# Altium PCB BMS pcb layout 2.PcbDoc
Units mil, origin at the board's own origin, x right, y up, seen from the top; angles counter-clockwise.
Board outline 3940 x 3940 mil, 2 copper layers (Top Layer, Bottom Layer); 47 components, 36 nets, 164 pads, 30 vias.
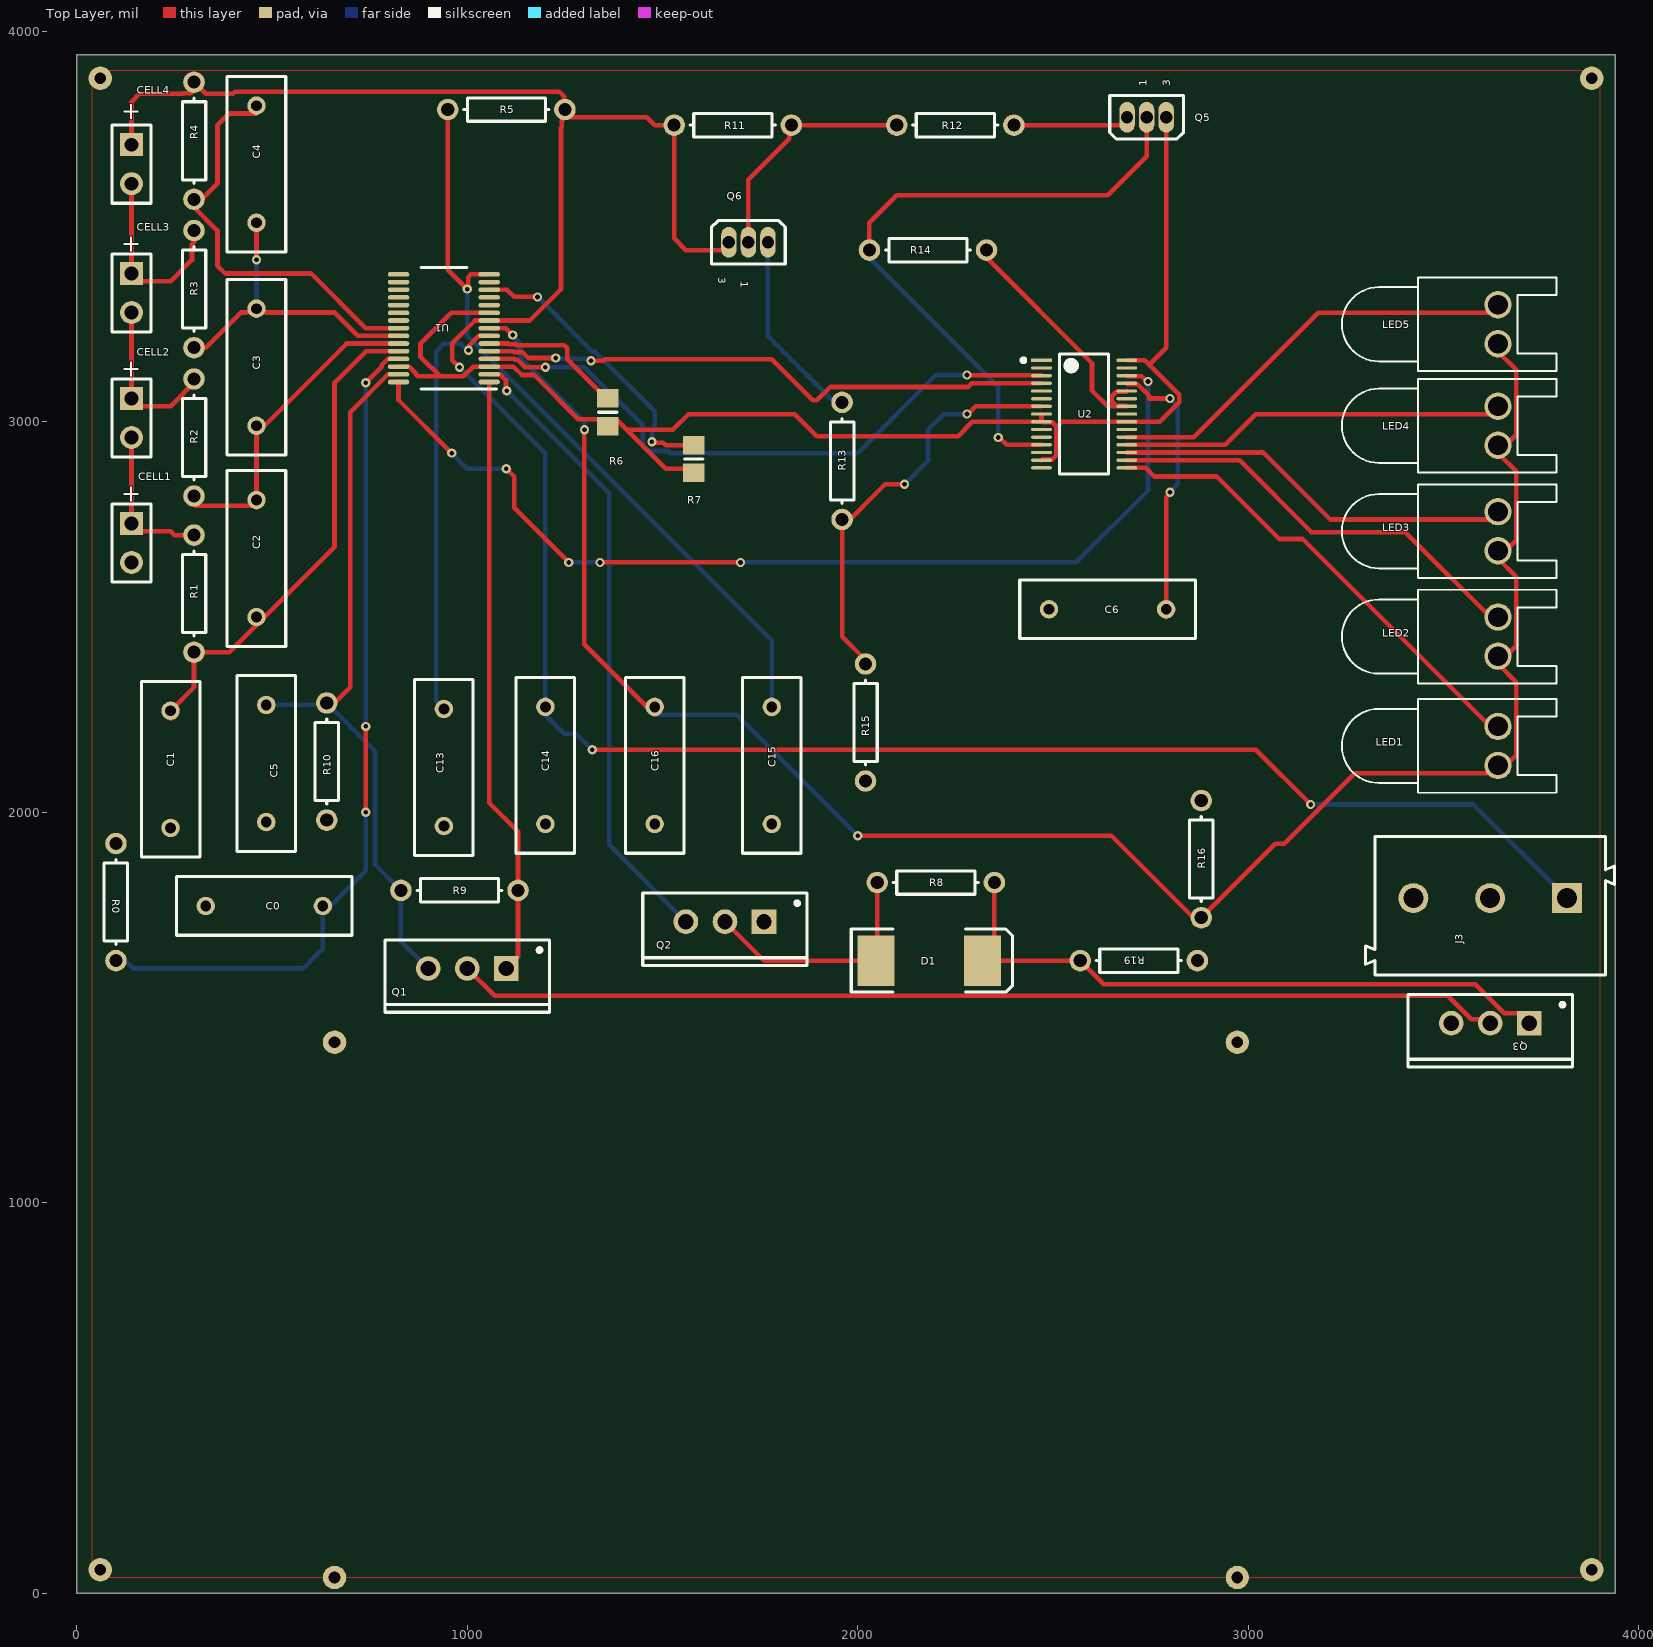
[diagram p0: Top Layer view]
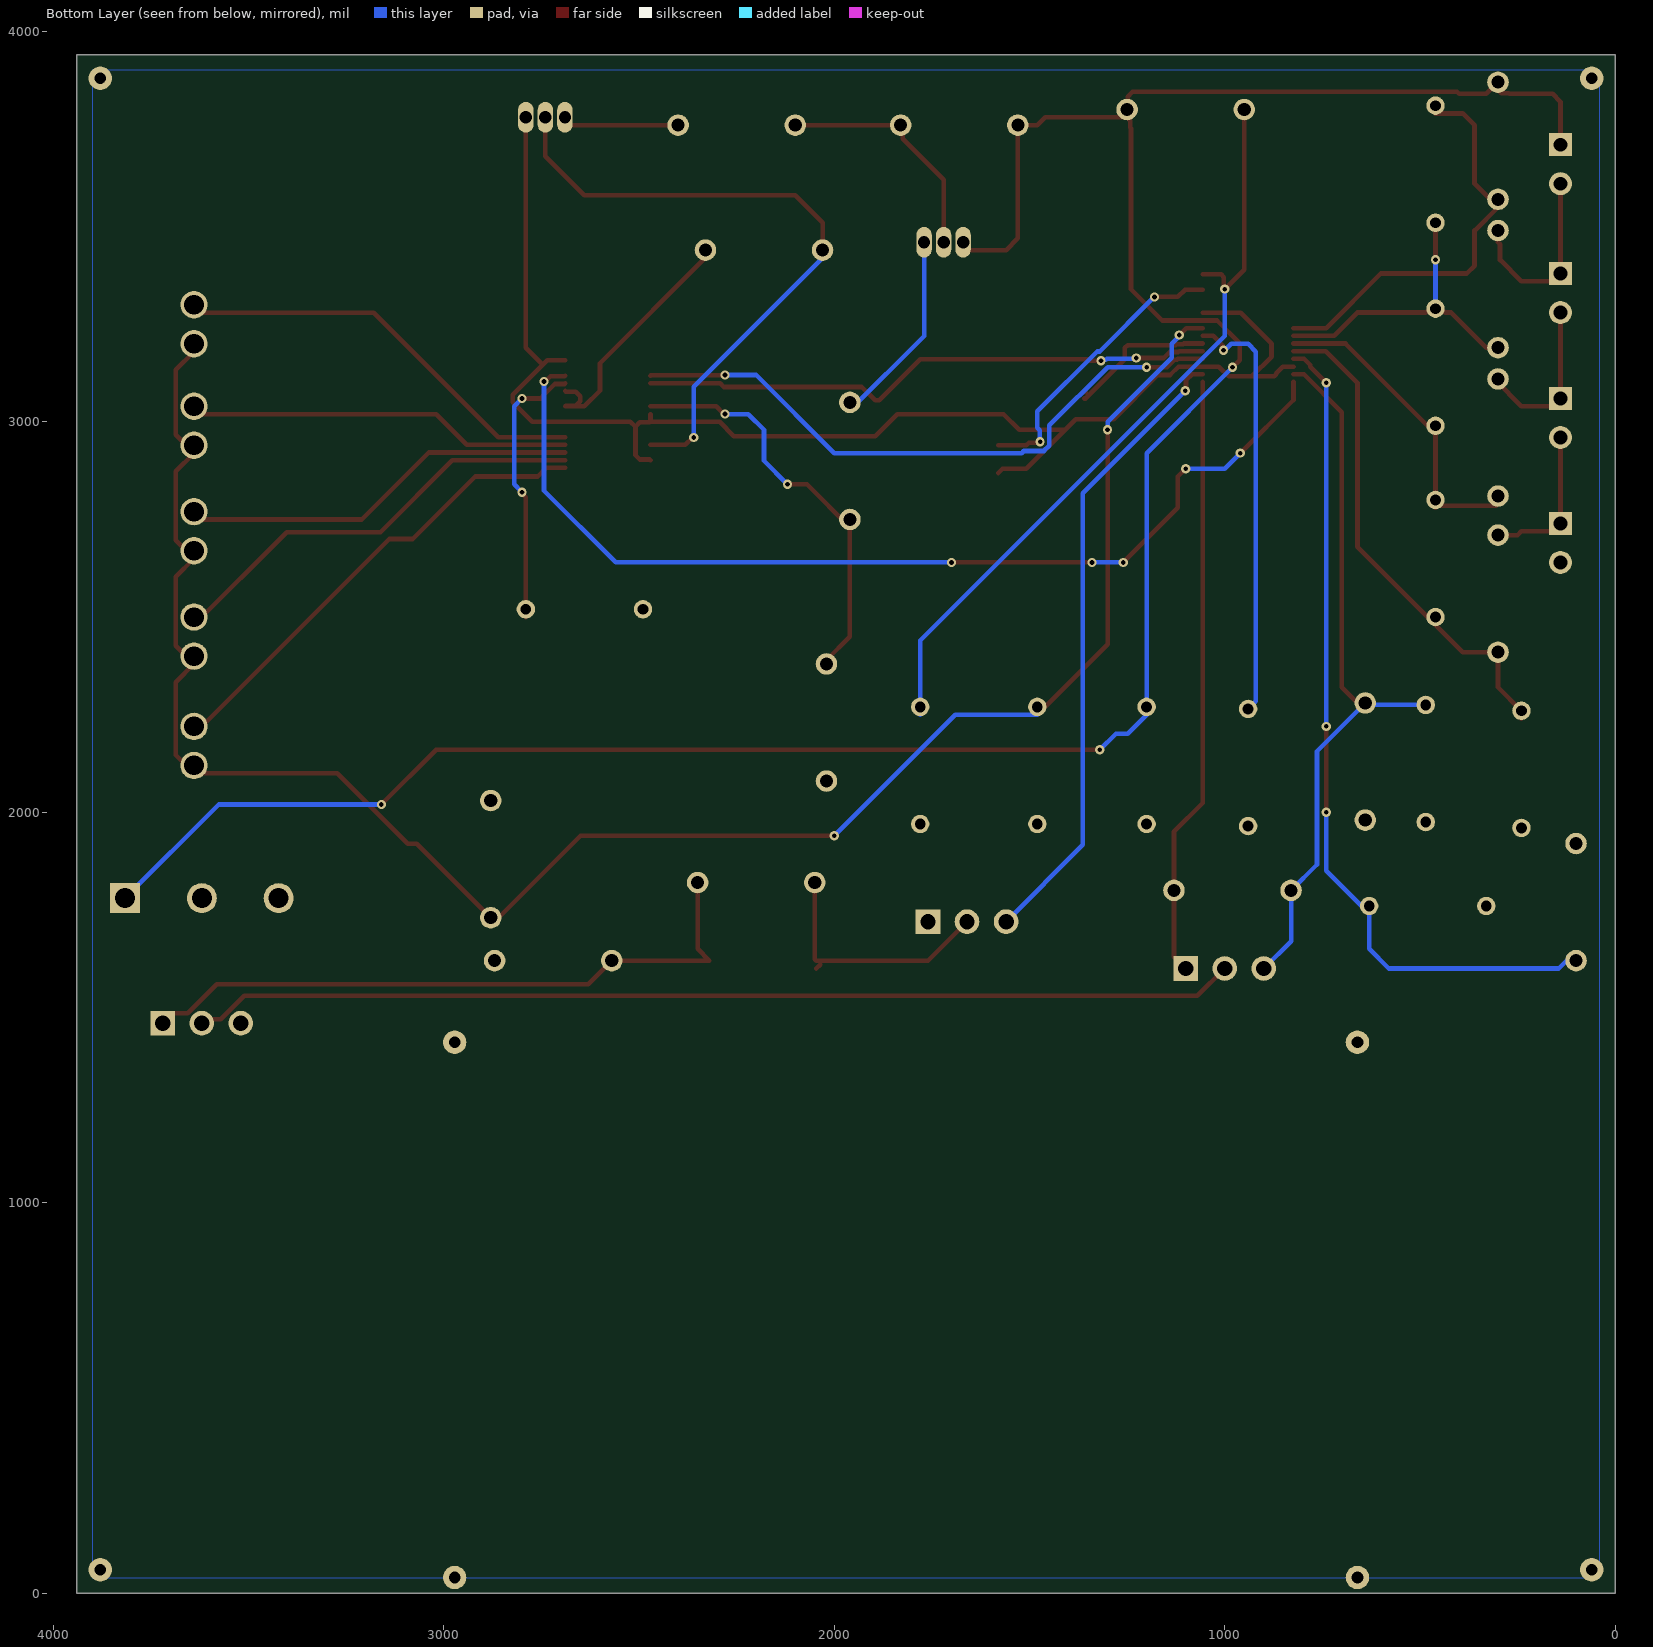
[diagram p1: Bottom Layer view, seen from below]

## Layer stack, top to bottom
Top Solder: solder mask 0.4, Solder Resist, Dk 3.5
Top Layer: signal copper 1.4
Dielectric 1: dielectric 12.6, FR-4, Dk 4.8
Bottom Layer: signal copper 1.4
Bottom Solder: solder mask 0.4, Solder Resist, Dk 3.5

## Board outline
0,3940 0,0 3940,0 3940,3940

## Design rules (kind name [scope] priority, off if disabled: settings)
Clearance Clearance_poly [InNamedPolygon('TOP-GND')or InNamedPolygon('BOT-GND')] p1: gap=25 ignorepadtopadclearanceinfootprint=FALSE
Clearance [All] p2: gap=5.91 ignorepadtopadclearanceinfootprint=FALSE
MinimumSolderMaskSliver [All] p1: minsoldermaskwidth=2.99
PolygonConnect [All] p1: connectstyle=Relief reliefconductorwidth=10 reliefentries=4 polygonreliefangle="90 Angle" airgapwidth=10
RoutingVias [All] p1: holewidth=12 width=23.62 viastyle="Through Hole" minholewidth=12 minwidth=23.62 maxholewidth=12 maxwidth=23.62
SilkToSolderMaskClearance [IsPad] p1: minsilkscreentomaskgap=7 clearancetoexposedcopper=TRUE
SolderMaskExpansion [All] p1: expansion=2.01 istentingtop=FALSE
Width [All] p1: maxlimit=78.74 minlimit=5.91 preferedwidth=11.81
28 further rules are at their usual default settings.

## Components (designator, comment, footprint, x,y, rotation, side; value= is the part's Value field where it differs from the comment)
C0 "" RAD-0.3 480,1760 r180 top value=1uF
C1 "" RAD-0.3 240,2110 r90 top value=1uF
C2 "" RAD-0.3 460,2650 r90 top value=1uF
C3 "" RAD-0.3 460,3140 r90 top value=1uF
C4 "" RAD-0.3 460,3660 r90 top value=1uF
C5 "" RAD-0.3 485,2125 r90 top value=1uF
C6 "" RAD-0.3 2640,2520 r0 top value=1uF
C13 "" RAD-0.3 940,2114.64 r90 top value=1uF
C14 "" RAD-0.3 1200,2120 r90 top value=1uF
C15 "" RAD-0.3 1780,2120 r90 top value=1uF
C16 "" RAD-0.3 1480,2120 r90 top value=1uF
CELL1 "" BAT-2 140,2690 r270 top
CELL2 "" BAT-2 140,3010 r270 top
CELL3 "" BAT-2 140,3330 r270 top
CELL4 "" BAT-2 140,3660 r270 top
D1 "" SMC 2183.19,1620 r0 top
J3 "691101710003" 691101710003 3619.99,1760.31 r180 top
LED1 "" LED-0 3640,2170 r270 top
LED2 "" LED-0 3640,2450 r270 top
LED3 "" LED-0 3640,2720 r270 top
LED4 "" LED-0 3640,2990 r270 top
LED5 "" LED-0 3640,3250 r270 top
Q1 "" TO-220AB 1000,1600 r180 top
Q2 "" TO-220AB 1660,1720 r180 top
Q3 "" TO-220AB 3620,1460 r180 top
Q5 "" E3#1 2740,3780 r90 top
Q6 "" E3#2 1720,3460 r270 top
R0 "" AXIAL-0.3 100,1770 r270 top value=1K
R1 "" AXIAL-0.3 300,2560 r270 top value=1K
R2 "" AXIAL-0.3 300,2960 r270 top value=1K
R3 "" AXIAL-0.3 300,3340 r270 top value=1K
R4 "" AXIAL-0.3 300,3720 r270 top value=1K
R5 "" AXIAL-0.3 1100,3800 r0 top value=10M
R6 "" 6-0805_N 1360,3024.57 r270 top
R7 "" 6-0805_N 1580,2904.57 r270 top
R8 "" AXIAL-0.3 2200,1820 r180 top value=1M
R9 "" AXIAL-0.3 980,1800 r0 top value=1M
R10 "" AXIAL-0.3 640,2130 r90 top
R11 "" AXIAL-0.3 1680,3760 r0 top value=1K
R12 "" AXIAL-0.3 2250,3760 r0 top value=10M
R13 "" AXIAL-0.3 1960,2900 r90 top value=10K
R14 "" AXIAL-0.3 2180,3440 r180 top value=10K
R15 "" AXIAL-0.3 2020,2230 r90 top value=10K
R16 "" AXIAL-0.3 2880,1880 r270 top value=1K
R19 "" AXIAL-0.3 2720,1620 r180 top value=1M
U1 "BQ7693000DBT" DBT0030A_N 940,3240 r180 top
U2 "BQ78350DBT-R1" FP-DBT0030A-IPC_C 2580,3020 r0 top

## Footprints (in the part's own frame and the unit in brackets; to place one, negate y for a bottom-side part, rotate by r counter-clockwise, add the part's x,y. Pads: shape width x height; smd on the part's side, far side on the other; paste and mask are expansions set on the pad)
6-0805_N [mm] "Chip Resistor, Body 2.0x1.2mm, IPC Medium Density"
  rect 1.2x1.4 smd: 1(-0.9,0) 2(0.9,0)
  silkscreen extent 0,-0.6 0,0.6, body extent -1.07,-0.7 1.07,0.7, height 0.7
691101710003 [mm] "5,00mm - modular - blue - Horizontal entry with pressure clamp - 12,6mm height - 03p"
  rect 1.95x1.95 hole 1.3: 1(-5,-0.5)
  round 1.95 hole 1.3: 2(0,-0.5) 3(5,-0.5)
  silkscreen extent -8.1,-4.5 8.1,4.5, body extent -8.1,-4.5 8.1,4.5, height 12.65
AXIAL-0.3 [mm] "Axial Device, Thru-Hole; 2 Leads; 0.3 in Pin Spacing"
  round 1.4 hole 0.85: 1(-3.81,0) 2(3.81,0)
  silkscreen extent -2.77,-0.76 2.77,0.76
BAT-2 [mm] "Battery; 2 Leads"
  rect 1.5x1.5 hole 0.9: 1(-1.27,0)
  round 1.5 hole 0.9: 2(1.27,0)
  silkscreen extent -2.54,-1.27 2.54,1.27
DBT0030A_N [mm]
  oval 1.4x0.3 smd paste+0 mask+0.051: 1(-2.95,3.5) 2(-2.95,3) 3(-2.95,2.5) 4(-2.95,2) 5(-2.95,1.5) 6(-2.95,1) 7(-2.95,0.5) 8(-2.95,0) 9(-2.95,-0.5) 10(-2.95,-1) 11(-2.95,-1.5) 12(-2.95,-2) 13(-2.95,-2.5) 14(-2.95,-3) 15(-2.95,-3.5) 16(2.95,-3.5) 17(2.95,-3) 18(2.95,-2.5) 19(2.95,-2) 20(2.95,-1.5) 21(2.95,-1) 22(2.95,-0.5) 23(2.95,0) 24(2.95,0.5) 25(2.95,1) 26(2.95,1.5) 27(2.95,2) 28(2.95,2.5) 29(2.95,3) 30(2.95,3.5)
  silkscreen extent -3.42,-3.95 1.5,3.95, body extent 0,0 0.25,0.25, height 0.25
E3#1 [mm] "TO, Flat Index; 3 In-Line, Axial Leads; Body Dia. 4.6mm; Lead Dia. 0.5 mm (max)"
  oval 2x1 hole 0.8: 1(0,1.27) 2(0,0)
  oval 2x1 hole 0.8 mask+0.051: 3(0,-1.27)
  silkscreen extent -1.41,-2.41 1.41,2.41
E3#2 [mm] "TO, Flat Index; 3 In-Line, Axial Leads; Body Dia. 4.6mm; Lead Dia. 0.5 mm (max)"
  oval 2x1 hole 0.8: 1(0,1.27) 2(0,0) 3(0,-1.27)
  silkscreen extent -1.41,-2.41 1.41,2.41
FP-DBT0030A-IPC_C [mm]
  rect 1.355x0.212 smd paste+0 mask+0: 1(-2.775,3.5)
  rrect100% 1.355x0.212 smd paste+0 mask+0: 2(-2.775,3) 3(-2.775,2.5) 4(-2.775,2) 5(-2.775,1.5) 6(-2.775,1) 7(-2.775,0.5) 8(-2.775,0) 9(-2.775,-0.5) 10(-2.775,-1) 11(-2.775,-1.5) 12(-2.775,-2) 13(-2.775,-2.5) 14(-2.775,-3) 15(-2.775,-3.5) 16(2.775,-3.5) 17(2.775,-3) 18(2.775,-2.5) 19(2.775,-2) 20(2.775,-1.5) 21(2.775,-1) 22(2.775,-0.5) 23(2.775,0) 24(2.775,0.5) 25(2.775,1) 26(2.775,1.5) 27(2.775,2) 28(2.775,2.5) 29(2.775,3) 30(2.775,3.5)
  silkscreen extent -4.08,-3.9 1.6,3.9, body extent -3.55,-4 3.55,4, height 0.25
LED-0 [mil] "LED; 2 Leads"
  round 70 hole 50: 1(50,0) 2(-50,0)
  silkscreen extent -120,-400 120,150
RAD-0.3 [mm] "Radial Cap, Thru-Hole; 2 Leads; 0.3 in Pin Spacing"
  round 1.2 hole 0.7: 1(-3.81,0) 2(3.81,0)
  silkscreen extent -5.71,-1.91 5.71,1.91
SMC [mm] "DO-214-AB/SMC; 2 C-Bend Leads; Body 7.9 x 5.9 mm, inc. leads (LxW)"
  rect 2.4x3.3 smd: 1(-3.475,0) 2(3.475,0)
  silkscreen extent -5.08,-2.05 5.42,2.06
TO-220AB [mm] "TO, Thru-Hole, Vertical, Heatsink Mounted; 3 In-Line Leads; Pitch 2.54 mm"
  rect 1.6x1.6 hole 1: 1(-2.54,0)
  round 1.6 hole 1: 2(0,0) 3(2.54,0)
  silkscreen extent -5.35,-1.85 5.35,2.85, body extent -5.4,-1.9 5.4,2.9, height 19.3

## Part data
C0 C1 C2 C3 C4 C5 C6: library part Cap, "Capacitor", LatestRevisionDate=17-Jul-2002, LatestRevisionNote="Re-released for DXP Platform.", PackageDescription="Radial Cap, Thru-Hole; 2 Leads; 0.3 in Pin Spacing", PackageReference=RAD-0.3, Published=8-Jun-2000, Publisher="Altium Limited"
C13 C14 C15 C16: library part Cap, "Capacitor", Supplier Part Number 1=70112128, LatestRevisionDate=17-Jul-2002, LatestRevisionNote="Re-released for DXP Platform.", PackageDescription="Radial Cap, Thru-Hole; 2 Leads; 0.3 in Pin Spacing", PackageReference=RAD-0.3, Published=8-Jun-2000, Publisher="Altium Limited", Supplier 1="Allied Electronics"
CELL1 CELL2 CELL3 CELL4: library part Battery, "Multicell Battery", LatestRevisionDate=17-Jul-2002, LatestRevisionNote="Re-released for DXP Platform.", PackageDescription="Battery; 2 Leads", PackageReference=BAT-2, Published=24-Mar-1999, Publisher="Altium Limited"
D1: library part Diode, "Default Diode", Code_JEDEC=DO-214-AB, LatestRevisionDate=17-Jul-2002, LatestRevisionNote="Re-released for DXP Platform.", PackageDescription="DO-214-AB/SMC; 2 C-Bend Leads; Body 7.9 x 5.9 mm, inc. leads (LxW)", PackageReference=SMC, PackageVersion=Sep-1996, Published=8-Jun-2000, Publisher="Altium Limited"
J3: library part CMP-1502-03257-1, "Series 101 - 5.00 mm Horizontal Entry Modular with Pressure Clamp WR-TBL, 3 pin", Manufacturer="Wurth Elektronik", Operating Temperature=-40to105degC, Datasheet URL=http://katalog.we-online.de/em/datasheet/6911017100xx.pdf, Manufacturer URL=http://www.we-online.de, Mounting Technology=THT, Package Reference=691101710003, Packaging=Box, Part Number=691101710003, Pin Number=3, Pitch=5.00mm, Publisher=WurthElektronik
LED1 LED2 LED3 LED4 LED5: library part LED0, "Typical INFRARED GaAs LED", LatestRevisionDate=08-Jul-2005, LatestRevisionNote="Mech Layer 1 removed.", PackageDescription="LED; 2 Leads", PackageReference=LED-0, Published=8-Jun-2000, Publisher="Altium Limited"
Q1 Q3: library part NMOS-2, "N-Channel Power MOSFET", ComponentLink1Description="Manufacturer Link", ComponentLink1URL=http://www.irf.com/, DatasheetVersion=PD-9.814, LatestRevisionDate=17-Jul-2002, LatestRevisionNote="Re-released for DXP Platform.", Note="Pin 2 is electrically connected to pin 4.", PackageDescription="TO, Thru-Hole, Vertical, Heatsink Mounted; 3 In-Line Leads; Pitch 2.54 mm", PackageReference=TO-220AB, PackageVersion=Feb-1997, Published=8-Jun-2000, Publisher="Altium Limited"
Q2: library part PMOS-2, "P-Channel Power MOSFET", ComponentLink1Description="Manufacturer Link", ComponentLink1URL=http://www.irf.com/, DatasheetVersion=PD-9.390D, LatestRevisionDate=17-Jul-2002, LatestRevisionNote="Re-released for DXP Platform.", Note="Pin 4 not drawn and electrically connected to Pin 2.", PackageDescription="TO, Thru-Hole, Vertical, Heatsink Mounted; 3 In-Line Leads; Pitch 2.54 mm", PackageReference=TO-220AB, PackageVersion=Feb-1997, Published=8-Jun-2000, Publisher="Altium Limited"
Q5: library part MOSFET-N, "N-Channel MOSFET", LatestRevisionDate=17-Jul-2002, LatestRevisionNote="Re-released for DXP Platform.", PackageDescription="TO, Flat Index; 3 In-Line, Axial Leads; Body Dia. 4.6mm; Lead Dia. 0.5 mm (max)", PackageReference=E3, PackageVersion=1995/1996, Published=8-Jun-2000, Publisher="Altium Limited"
Q6: library part MOSFET-P, "P-Channel MOSFET", LatestRevisionDate=17-Jul-2002, LatestRevisionNote="Re-released for DXP Platform.", PackageDescription="TO, Flat Index; 3 In-Line, Axial Leads; Body Dia. 4.6mm; Lead Dia. 0.5 mm (max)", PackageReference=E3, PackageVersion=1995/1996, Published=8-Jun-2000, Publisher="Altium Limited"
R0 R1 R2 R3 R4 R5 R8 R9 R10 R11 R12 R13 R14 R15 R16 R19: library part Res1, "Resistor", LatestRevisionDate=17-Jul-2002, LatestRevisionNote="Re-released for DXP Platform.", PackageDescription="Axial Device, Thru-Hole; 2 Leads; 0.3 in Pin Spacing", PackageReference=AXIAL-0.3, Published=8-Jun-2000, Publisher="Altium Limited"
  R10: R10=1
R6 R7: library part "Res Thermal", "Thermistor", Code_IPC=RESC2012, LatestRevisionDate=29-May-2009, LatestRevisionNote="IPC-7351 Footprint Added.", PackageDescription="Chip Resistor 0805 Case Size", PackageReference=6-0805, PackageVersion=Mar-2003, Published=24-Mar-1999, Publisher="Altium Limited"
U1: "No Description Available", Mfr_Name="Texas Instruments", Copyright="Copyright (C) 2022 Ultra Librarian. All rights reserved.", Manufacturer_Part_Number=BQ7693000DBT, RefDes=RefDes, Type=DEV
U2: library part CMP-04911-000039-1, "IC BATTERY MGMT CTRLR 30TSSOP", Case/Package=TSSOP, Max Operating Temperature=85°C, Max Supply Voltage=2.6V, Min Operating Temperature=-40°C, Min Supply Voltage=2.4V, Output Voltage=5.5V, Contact Plating=Gold, Fault Protection="Over Current", Interface=SMBus, Lead Free="Lead Free", Mount="Surface Mount", Number of Pins=30, Packaging=Rail/Tube, REACH SVHC="No SVHC", RoHS Compliant=Yes

## Free pads (board coordinates)
  round 60 hole 30: 2(60,3880) 3(60,60) 4(3880,60) 5(660,1410.89) 5(3880,3880) 6(2972.5,1410.89) 7(2972.5,40) 8(660,40)

## Via types
v1: diameter 23.62, hole 12, Top Layer to Bottom Layer, 30 vias

## Nets (pads, with @x,y where several pads share a name; then routed paths per layer and width w, separated by ;. In a path a pad name is that pad's centre, name@x,y a point inside that pad or via, vN(x,y) a via of type N, cw(c..) or ccw(c..) an arc to the next point about the centre after c; other vN are vias at no path point)
ALERT: U1.30 U2.28 | length 2601.2
  Top Layer w11.81: U1.30 823.86,3056.14 v1(960,2920) ; v1(1100,2880) 1120,2860 1120,2780 v1(1260,2640) ; v1(1340,2640) v1(1700,2640) ; U2.28 2690.99,3116.7 2726.95,3116.7 2740.23,3103.42 v1(2743.42,3103.42)
  Bottom Layer w11.81: v1(960,2920) 1000,2880 v1(1100,2880) ; v1(1260,2640) v1(1340,2640) ; v1(1700,2640) 2560,2640 2743.42,2823.42 v1(2743.42,3103.42)
BAT: C15.2 R5.1 U1.15 | length 1962.3
  Top Layer w11.9: R5.1@950,3780 950,3390 v1(1000,3340) 1000,3343.17 1002.26,3345.43 1002.26,3370.83 1009.23,3377.8 U1.15
  Bottom Layer w11.81: v1(1000,3340) 1000,3220 1780,2440 C15.2@1780,2250
CAP1: C13.2 U1.7 | length 1104.7
  Top Layer w11.81: v1@1006.49,3183.3 v1(1003.3,3183.3) 1005.56,3185.56 1005.56,3196.75 1029.12,3220.31 U1.7
  Bottom Layer w11.81: C13.2@940,2260 C13.2 920,2284.64 920,3180 940,3200 983.4,3200 1000.1,3183.3 v1(1003.3,3183.3)
CHG: Q2.3 U1.2 | length 1626.4
  Top Layer w11.81: U1.2 1083.16,3121.89 1099.04,3106.01 1099.04,3082.13 v1(1101.3,3079.87)
  Bottom Layer w11.81: v1(1101.3,3079.87) 1363.62,2817.55 1363.62,1916.38 Q2.3
DSG: Q1.1 R9.2 U1.1 | length 1545.2
  Top Layer w11.81: U1.1 1056.14,2023.86 1130,1950 R9.2 1130,1630 Q1.1
GND: C0.2 C1.1 C5.1 C6.1 C13.1 C14.1 C15.1 C16.1 CELL1.2 J3.3 pad.2 pad.3 pad.4 pad.5 pad.6 pad.7 pad.8 Q2.1 Q3.3 Q5.3 R0.1 R6.2 R7.2 R10.1 R15.1 R16.1 R19.1 U1.3 U1.10 U1.28 U2.8 U2.9 U2.14 U2.22 U2.30 | length 3661.6
  Top Layer w11.81: U1.28 850.88,3141.57 868.17,3124.29 868.17,3121.57 873.36,3116.38 930.54,3116.38 ; U1.10 959.37,3279.37 880,3200 880,3166.92 930.54,3116.38 ; R6.2@1381.81,3006.69 1381.65,3006.85 1284.29,3006.85 1171.14,3120 1140,3120 1118.43,3141.57 U1.3 1014.98,3141.57 989.78,3116.38 930.54,3116.38 ; R6.2@1382.65,3005.85 1508.5,2880 1569.13,2880 R7.2 ; 1410.17,2980 1526.59,2980 1566.59,3020 1839.05,3020 1895.43,2963.62 2257.03,2963.62 2293.41,3000 2470.73,3000 U2.9 ; U2.14 2472.46,2903.61 2497.89,2903.61 2509.23,2914.95 2509.23,2987.25 ; U2.8 U2.9 ; U2.30 2735.61,3157.8 2746.7,3146.7 ; Q5.3@2790,3760 2790,3190 2746.7,3146.7 ; U2.9 2472.46,2998.59 2497.89,2998.59 2509.23,2987.25 ; 2509.23,2987.25 2522.29,3000.31 U2.22 2773.72,3000.31 2823.62,3050.22 2823.62,3069.78 2755.61,3137.8 2746.7,3146.7
LED1: LED1.2 U2.16 | length 1233.3
  Top Layer w11.81: U2.16 2737.8,2882.2 2760,2860 2920,2860 3080,2700 3140,2700 LED1.2@3640,2200
LED2: LED2.2 U2.17 | length 1125.5
  Top Layer w11.81: U2.17 2978.11,2901.89 3162.28,2717.72 3402.28,2717.72 LED2.2@3640,2480
LED3: LED3.2 U2.18 | length 1021.8
  Top Layer w11.81: U2.18 3038.43,2921.57 3210,2750 LED3.2@3640,2750
LED4: LED4.2 U2.19 | length 983.3
  Top Layer w11.81: U2.19 2941.26,2941.26 3020,3020 LED4.2@3640,3020
LED5: LED5.2 U2.20 | length 1082.9
  Top Layer w11.81: U2.20 2860.94,2960.94 3180,3280 LED5.2@3640,3280
NetC5_2: C5.2 Q1.3 R9.1 R10.2 U1.29 | length 1898.6
  Top Layer w11.81: R10.2@640,2260 700,2320 700,3025.05 796.84,3121.89 U1.29
  Bottom Layer w11.81: C5.2 635,2275 R10.2 763.62,2156.38 763.62,1866.38 R9.1 830,1670 Q1.3
NetC6_2: C6.2 U2.27 | length 711.5
  Top Layer w11.81: U2.27 2690.99,3097.02 2716.42,3097.02 2746.59,3066.85 2746.59,3060 v1(2800,3060) ; C6.2@2790,2500 2790,2806.8 2800,2816.8 v1(2800,2820)
  Bottom Layer w11.81: v1(2800,2820) 2820,2840 2820,3040 v1(2800,3060)
NetCELL1_1: CELL1.1 CELL2.2 R1.1 | length 384.1
  Top Layer w11.9: CELL2.2@140,2940 CELL1.1 140,2720 240,2720 250,2710 R1.1
NetCELL2_1: CELL2.1 CELL3.2 R2.1 | length 406.1
  Top Layer w11.9: CELL3.2@140,3260 140,3050 150,3040 240,3040 R2.1@305,3105
NetCELL3_1: CELL3.1 CELL4.2 R3.1 | length 494.9
  Top Layer w11.9: CELL4.2@140,3630 140,3360 240,3360 294.72,3414.72 294.72,3454.72 300,3460
NetD1_1: D1.1 Q2.2 R8.2 | length 643.4
  Top Layer w11.81: Q2.2 1760,1620 D1.1 2050,1623.62 R8.2 ; D1.1@2036.38,1610 D1.1@2046.38,1600
NetD1_2: D1.2 Q3.1 R8.1 R19.2 | length 1678.7
  Top Layer w11.81: R8.1 2350,1650 D1.2 R19.2 2630,1560 3581.25,1560 3655.65,1485.59 3694.41,1485.59 Q3.1
NetQ1_2: Q1.2 Q3.2 | length 2678
  Top Layer w11.81: Q1.2 1070,1530 3511.25,1530 3571.45,1469.79 3610.21,1469.79 Q3.2
NetQ5_1: Q5.1 R12.2 | length 300
  Top Layer w11.81: R12.2@2390,3760 Q5.1@2690,3760
NetQ5_2: Q5.2 R14.2 U2.12 | length 1665.6
  Top Layer w11.81: R14.2@2030,3420 2030,3510 2100,3580 2640,3580 2740,3680 Q5.2@2740,3760 ; v1(2360,2960) 2363.2,2960 2381.94,2941.26 U2.12
  Bottom Layer w11.81: R14.2@2030,3420 2360,3090 v1(2360,2960)
NetQ6_1: Q6.1 R13.2 | length 488.7
  Bottom Layer w11.81: Q6.1@1770,3440 1770,3220 R13.2@1960,3030
NetQ6_2: Q6.2 R11.2 R12.1 | length 635.6
  Top Layer w11.81: Q6.2@1720,3440 1720,3620 1824.8,3724.8 1824.8,3754.8 R11.2 R12.1
NetR6_1: R6.1 U1.6 | length 383.2
  Top Layer w11.81: U1.6 1104.89,3200.63 1106.86,3198.66 1124,3198.66 1125.96,3196.69 1248.64,3196.69 1255.56,3189.78 1255.56,3160.51 1356.06,3060 R6.1 ; R6.1@1356.06,3075.43 R6.1@1360,3075.43
NetR13_1: R13.1 R15.2 U2.7 | length 1050.9
  Top Layer w11.81: R15.2@2020,2390 1960,2450 1960,2730 2070,2840 v1(2120,2840) ; v1@2280.16,3019.84 v1(2280,3020) 2282.39,3020 2302.07,3039.68 U2.7
  Bottom Layer w11.81: v1(2120,2840) 2180,2900 2180,2980 2220,3020 v1(2280,3020)
NetR14_1: R14.1 U2.24 U2.26 | length 658.9
  Top Layer w11.81: R14.1@2330,3420 2600,3150 2600,3080 2640.32,3039.68 U2.24 2687.55,3041.41 2662.11,3041.41 2650.78,3052.75 2650.78,3065.99 2662.11,3077.33 2687.55,3077.33 U2.26
REGOUT: C16.2 LED1.1 LED2.1 LED3.1 LED4.1 LED5.1 R16.2 U1.8 | length 4982.7
  Top Layer w11.81: U1.8 1098.93,3240 v1(1116.65,3222.28) ; v1(1300,2980) 1300,2430 C16.2@1480,2250 ; v1(2000,1940) 2650,1940 2880,1710 R16.2 3069.14,1919.14 3092.55,1919.14 3273.41,2100 3280,2100 3640,2100 3686.81,2146.81 3686.81,2333.19 3640,2380 3686.81,2426.81 3686.81,2603.19 3640,2650 3686.81,2696.81 3686.81,2873.19 3640,2920 3686.81,2966.81 3686.81,3133.19 LED5.1@3640,3180
  Bottom Layer w11.81: v1(1116.65,3222.28) 1116.65,3219.09 1135.86,3199.87 1135.86,3164.14 1300,3000 v1(1300,2980) ; C16.2@1480,2250 1690,2250 v1(2000,1940)
REGSRC: C14.2 CELL4.1 J3.1 Q6.3 R4.1 R5.2 R11.1 U1.9 | length 6700.9
  Top Layer w11.9: CELL4.1@140,3690 CELL4.1 140,3820 160,3840 271.43,3840 273.14,3841.71 291.71,3841.71 300,3850 R4.1@304.03,3850 ; R4.1 330,3840 399.61,3840 405.09,3845.48 1236.09,3845.48 1248.53,3833.03 1248.53,3781.47 R5.2@1250,3780 ; v1(980,3140) 961.7,3158.3 961.7,3201.7 1019.68,3259.68 U1.9 1159.68,3259.68 1240,3340 1240,3751.43 1241.71,3753.14 1241.71,3771.71 R5.2@1250,3780 ; v1(1320,2160) 3020,2160 v1(3160,2020) ; Q6.3@1670,3440 1560,3440 1530,3470 R11.1 1480,3760 1460,3780 R5.2@1250,3780
  Bottom Layer w11.9: v1(980,3140) 1200,2920 C14.2 1200,2250 1248.39,2201.61 1278.39,2201.61 v1(1320,2160) ; v1(3160,2020) 3576.85,2020 J3.1
SCL: U1.5 U2.4 | length 1487.7
  Top Layer w11.81: U1.5 1116.66,3180.94 1118.63,3178.98 1141.02,3178.98 1156.38,3163.62 v1(1226.38,3163.62) ; v1(1316.7,3156.7) 1348.84,3156.7 1352.14,3160 1780,3160 1885.11,3054.89 1894.89,3054.89 1929.37,3089.37 2282.78,3089.37 2292.15,3098.74 U2.4
  Bottom Layer w11.81: v1(1226.38,3163.62) 1228.19,3161.81 1301.59,3161.81 1304.43,3158.96 1314.44,3158.96 v1(1316.7,3156.7)
SDA: U1.4 U2.3 | length 1630
  Top Layer w11.81: U1.4 1120.28,3161.26 1122.25,3159.29 1128.64,3159.29 1147.93,3140 v1(1200,3140) v1@1198.74,3141.26 ; v1(2280,3120) 2280.79,3119.21 2469.95,3119.21 U2.3
  Bottom Layer w11.81: v1(1200,3140) 1300,3140 1449.14,2990.86 1449.14,2939.36 1462.98,2925.52 1514.48,2925.52 1520,2920 2000,2920 2200,3120 v1(2280,3120)
TS2: R7.1 U1.13 | length 744.6
  Top Layer w11.81: U1.13 1101.57,3338.43 1120,3320 v1(1180,3320) ; v1(1472.77,2949.14) 1475.03,2946.88 1501.32,2946.88 1508.2,2940 R7.1
  Bottom Layer w11.81: v1(1180,3320) 1319.67,3180.33 1326.49,3180.33 1480,3026.81 1480,2984.58 1474.09,2978.67 1474.09,2950.47 v1(1472.77,2949.14)
VC0: C0.1 R0.2 U1.27 | length 2153.9
  Top Layer w11.81: v1(740,2000) v1(740,2220) ; v1(740,3100) 781.26,3141.26 781.26,3145.68 796.84,3161.26 U1.27
  Bottom Layer w11.81: R0.2@120,1630 120,1624.24 144.24,1600 580,1600 630,1650 630,1740 740,1850 v1(740,2000) ; v1(740,2220) v1(740,3100)
VC1: C1.2 C2.1 R1.2 U1.26 | length 1284.1
  Top Layer w11.9: C1.2@240,2240 C1.2 300,2320 R1.2 390,2410 660,2680 660,3100 740.94,3180.94 U1.26
VC2: C2.2 C3.1 R2.2 U1.25 | length 813.5
  Top Layer w11.9: R2.2@300,2790 305,2785 455,2785 460,2780 C2.2 460,2970 690.63,3200.63 U1.25
VC3: C3.2 C4.1 R3.2 U1.24 | length 801.2
  Top Layer w11.9: R3.2 330,3190 420,3280 435.36,3280 438.59,3283.24 456.76,3283.24 460,3280 463.24,3283.24 481.41,3283.24 484.64,3280 660,3280 719.69,3220.31 U1.24 ; v1(460,3415) C4.1@460,3490
  Bottom Layer w11.81: C3.2@460,3280 C3.2
  Bottom Layer w11.9: C3.2 v1(460,3415)
VC4: C4.2 R4.2 U1.23 | length 1052.3
  Top Layer w11.9: C4.2@460,3790 390,3790 360,3760 360,3610 300,3550 360,3490 360,3400 380,3380 600,3380 740,3240 U1.23
pads on no net: J3.2 U1.11 U1.12 U1.14 U1.16 U1.17 U1.18 U1.19 U1.20 U1.21 U1.22 U2.1 U2.2 U2.5 U2.6 U2.10 U2.11 U2.13 U2.15 U2.21 U2.23 U2.25 U2.29

## Polygon pours and split planes (outlines as drawn)
GND on Bottom Layer "BOT-GND" (solid, remove dead copper, shelved, pour order 3): 40,3900 3900,3900 3900,40 40,40
GND on Top Layer "TOP-GND" (solid, shelved, pour order 4): 40,3900 3900,3900 3900,40 40,40

## Text inside footprints (layer, text, board x,y; h text height)
CELL1: Top Overlay "+" at 120,2840 h45.28 r270
CELL2: Top Overlay "+" at 120,3160 h45.28 r270
CELL3: Top Overlay "+" at 120,3480 h45.28 r270
CELL4: Top Overlay "+" at 120,3820 h45.28 r270
Q5: Top Overlay "1" at 2740,3860 h20 r90; Top Overlay "3" at 2800,3860 h20 r90
Q6: Top Overlay "3" at 1642.72,3370.43 h20 r270; Top Overlay "1" at 1700,3360 h20 r270